# Altium PCB Schaltbox.PcbDoc
Units mm, origin at the board's own origin, x right, y up, seen from the top; angles counter-clockwise.
Board outline 189.6 x 139.6 mm, 2 copper layers (Top Layer, Bottom Layer); 36 components, 30 nets, 198 pads, 10 vias.
Unrouted connection lines stored in the file: 2.
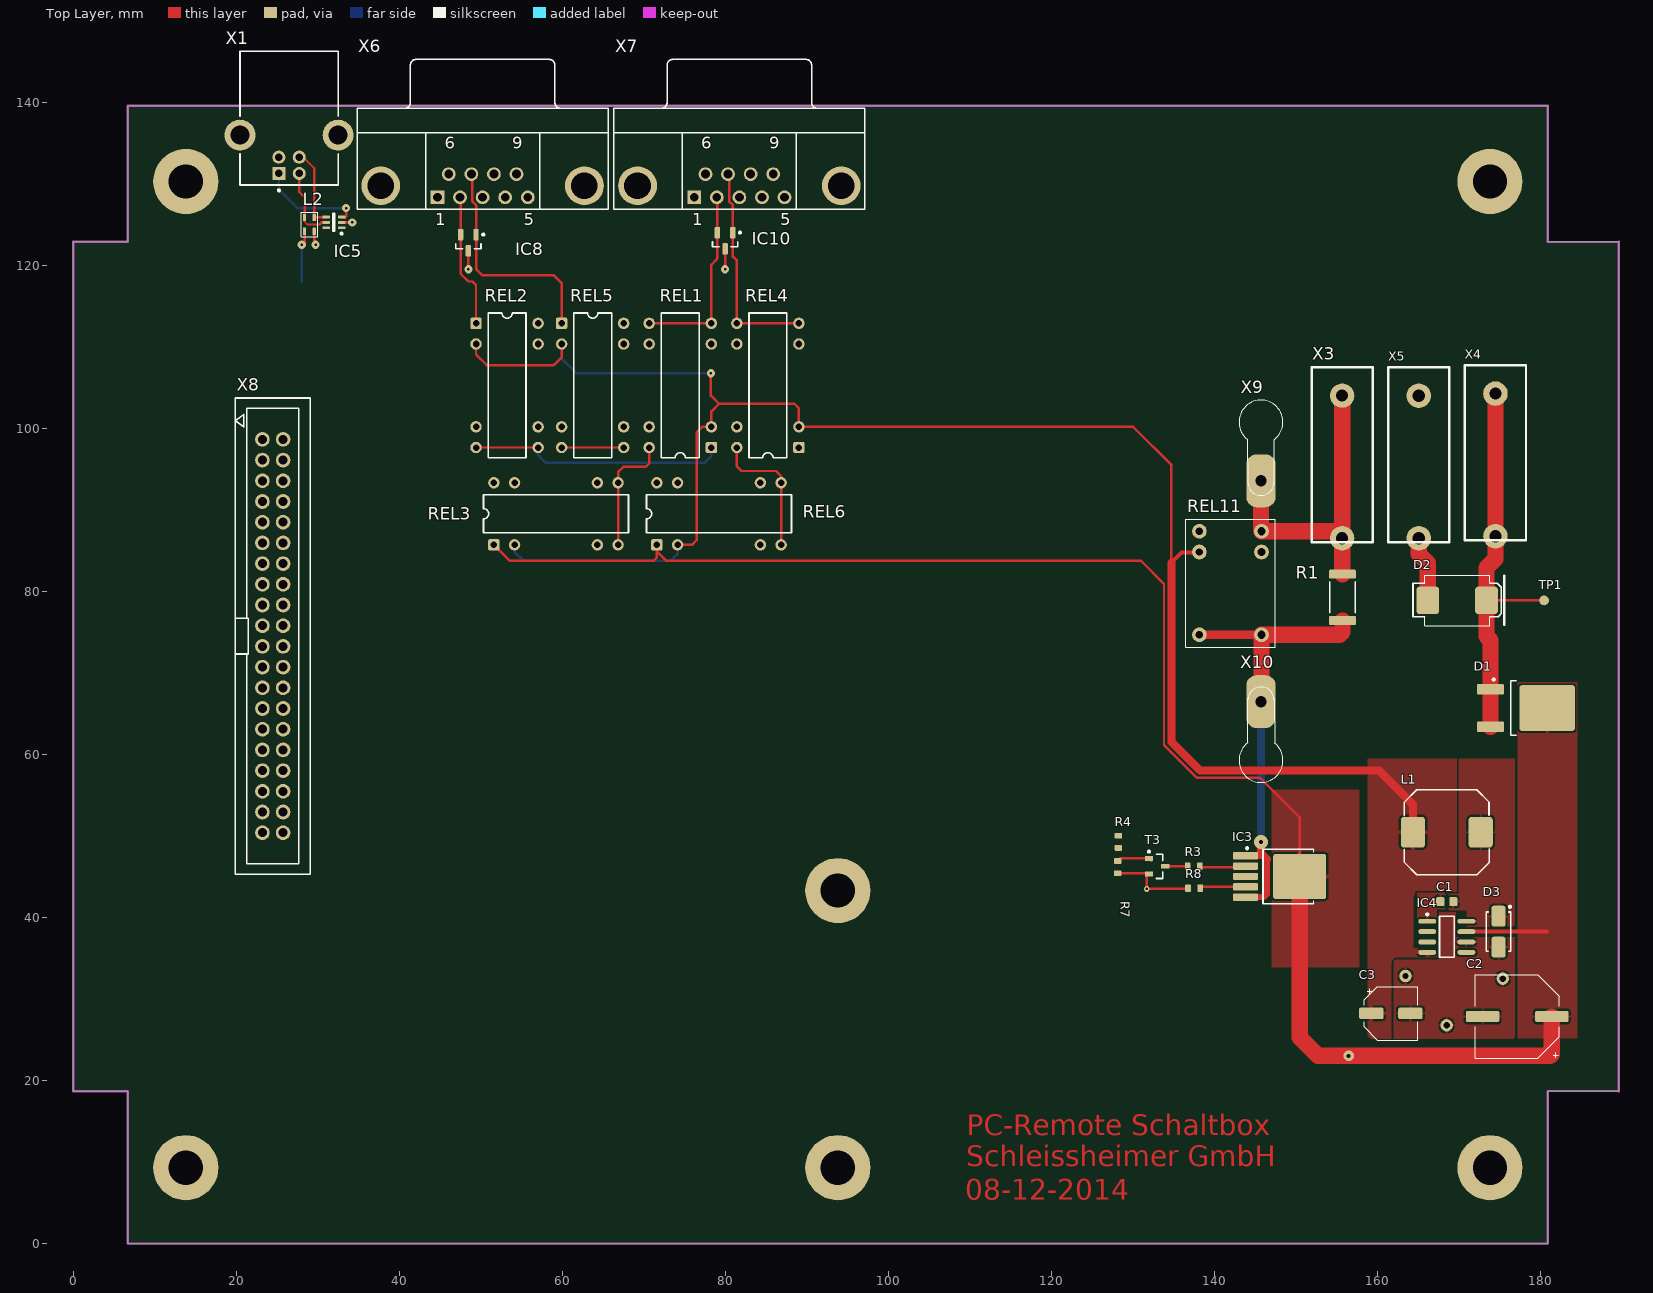
[diagram p0: Top Layer view]
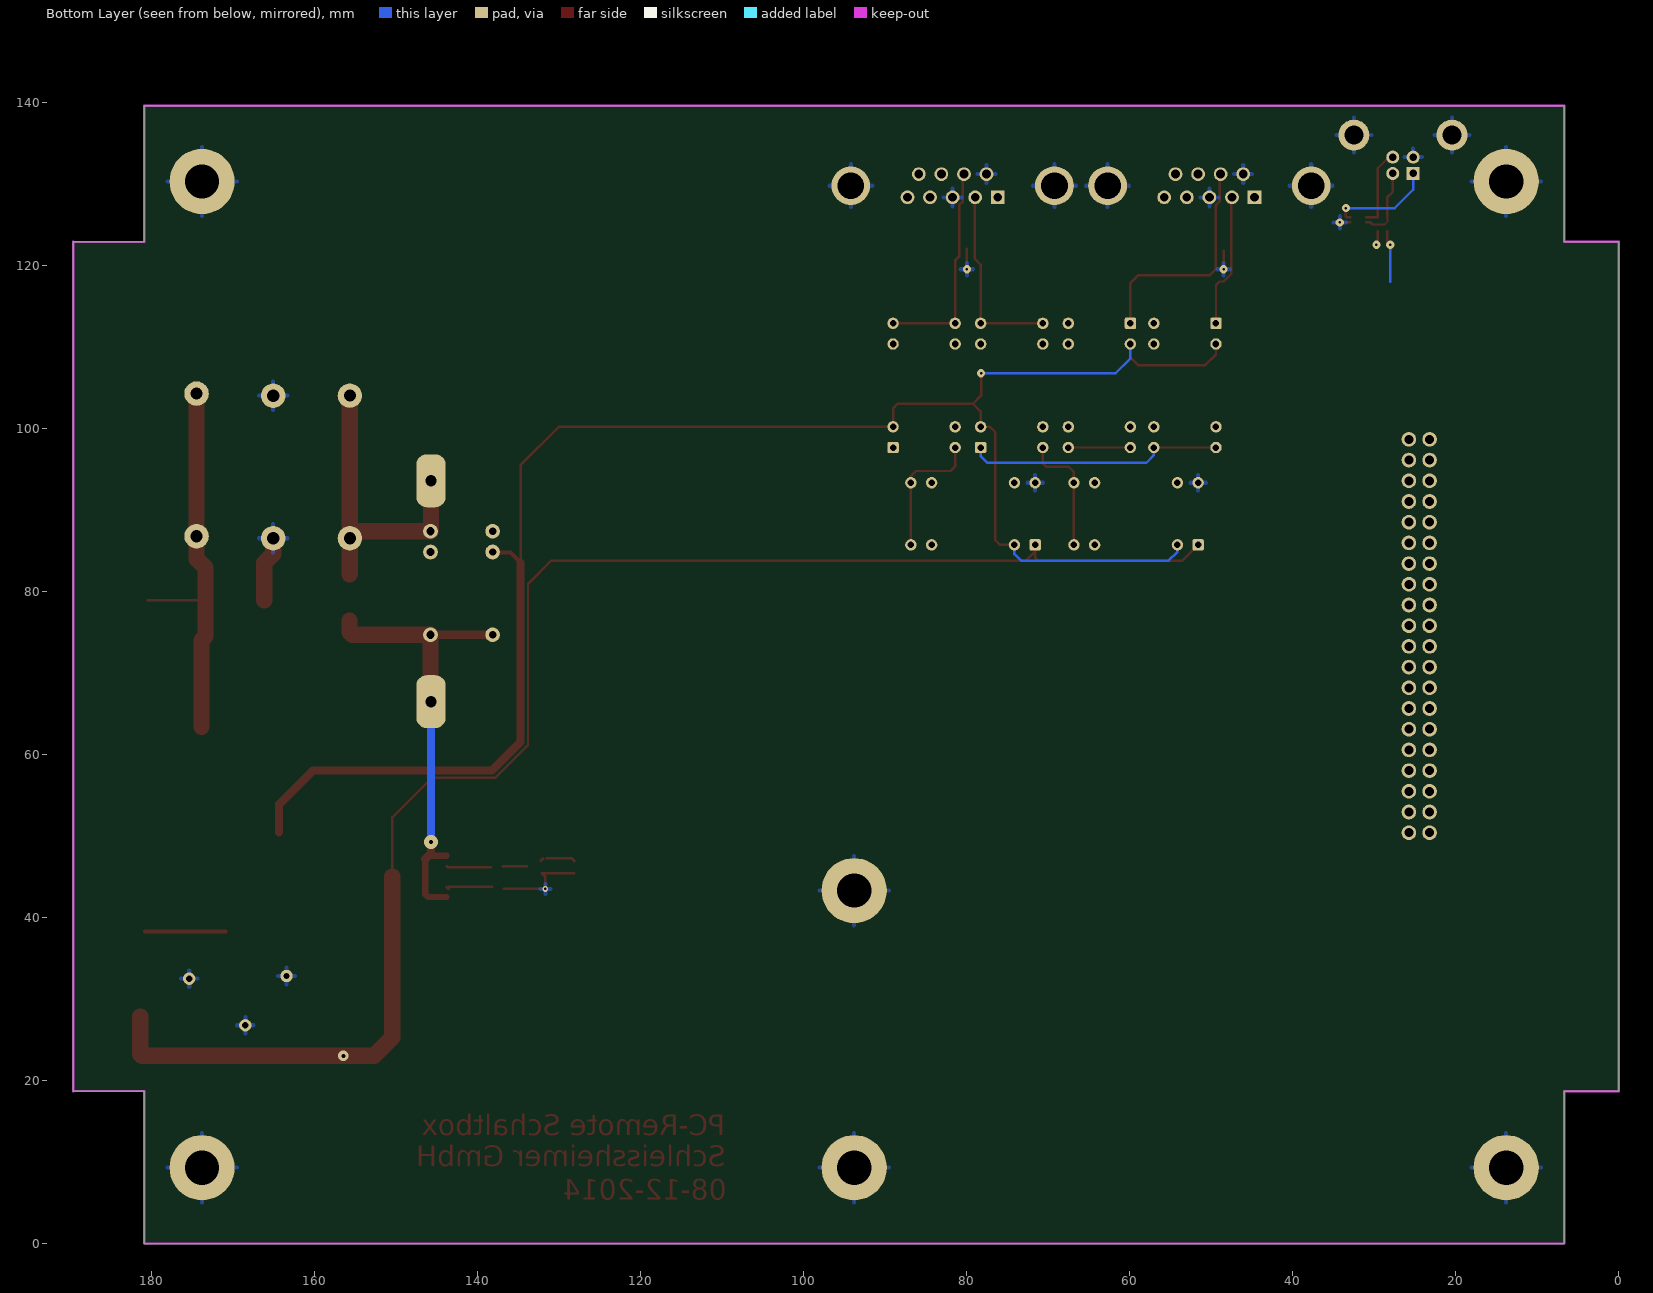
[diagram p1: Bottom Layer view, seen from below]
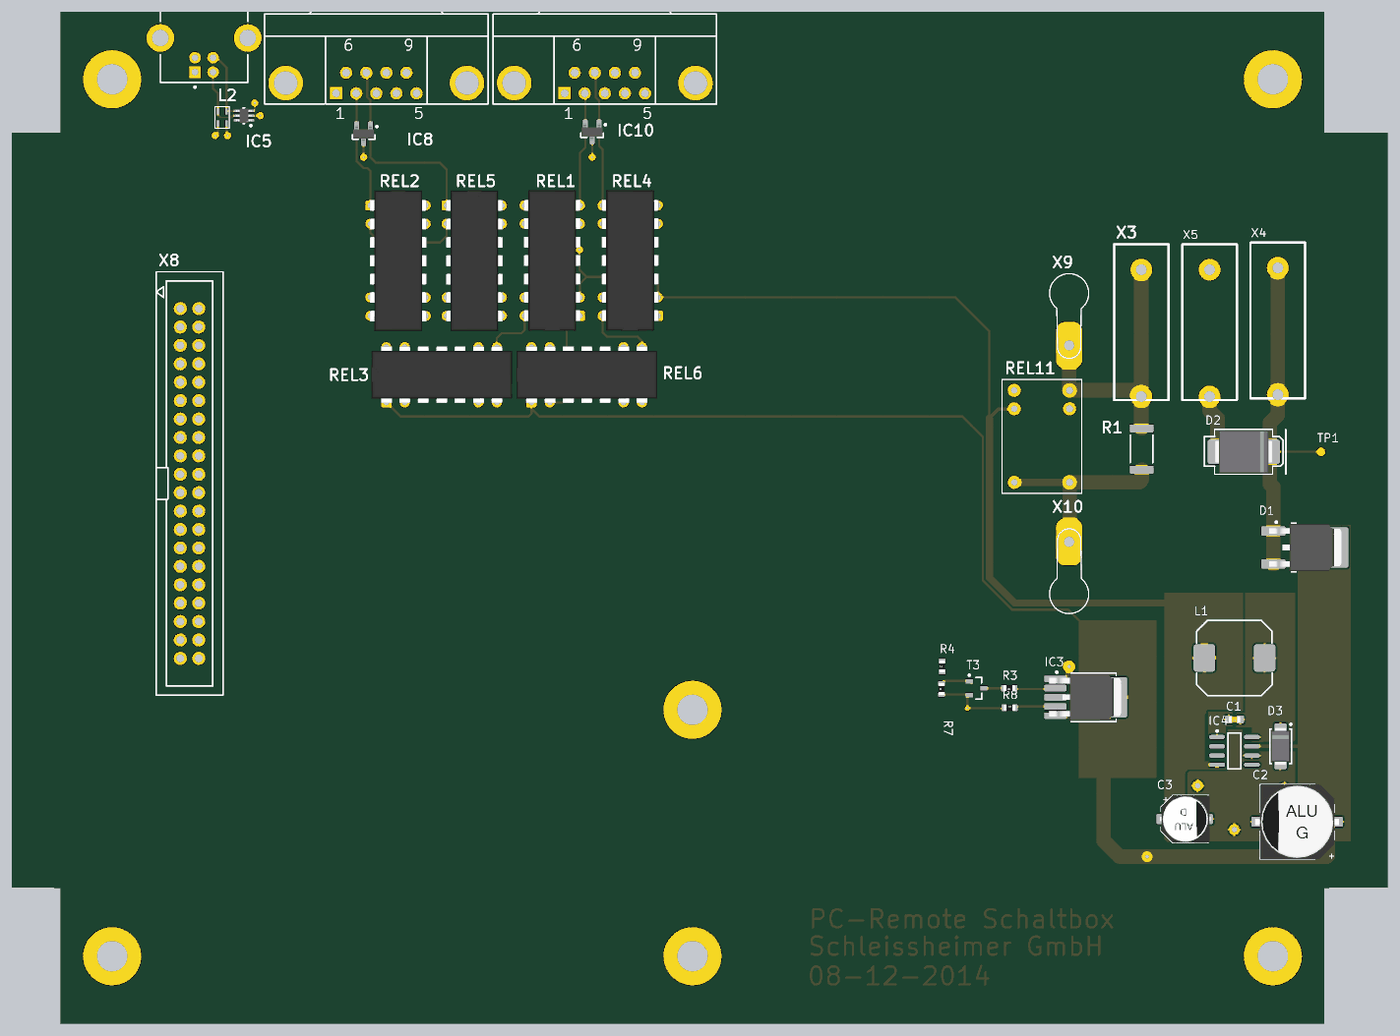
[diagram p2: 3D render of the assembled board from above, using the file's embedded part models]

## Layer stack, top to bottom
Top Solder: solder mask 0.0102, Solder Resist, Dk 3.5
Top Layer: signal copper 0.0356
Dielectric 1: dielectric 0.32, FR-4, Dk 4.8
Bottom Layer: signal copper 0.0356
Bottom Solder: solder mask 0.0102, Solder Resist, Dk 3.5

## Board outline
0.033,18.67 0.033,122.87 6.733,122.87 6.733,139.57 180.933,139.57 180.933,122.87 189.633,122.87 189.633,18.669 180.933,18.669 180.933,-0.03 6.733,-0.03 6.733,18.67

## Design rules (kind name [scope] priority, off if disabled: settings)
Clearance [All] p1: gap=0.254
PlaneConnect [All] p1: planeconnectstyle=Relief reliefexpansion=0.508 reliefentries=4 reliefconductorwidth=0.5 reliefairgap=0.254
PolygonConnect [All] p1: connectstyle=Relief reliefconductorwidth=0.5 reliefentries=4 polygonreliefangle="90 Angle" airgapwidth=0.254
RoutingVias [All] p1: holewidth=0.711 width=1.27 viastyle="Through Hole" minholewidth=0.3 minwidth=1 maxholewidth=0.711 maxwidth=1.27
SolderMaskExpansion [All] p1: expansion=0.102
Width [All] p1: maxlimit=2 minlimit=0.2 preferedwidth=0.3
28 further rules are at their usual default settings.

## Components (designator, comment, footprint, x,y, rotation, side; value= is the part's Value field where it differs from the comment)
C1 "10nF" C0603MD 168.546,41.919 r180 top
C2 "100µF / 63V" ALU-G 177.182,27.822 r0 top
C3 "68µF/16V Low ESW" ALU-D 161.688,28.203 r180 top
D1 "VS-MURB2020CTPBF" TO252-3_LD_(DPAK) 178.452,65.668 r0 top
D2 "SMCJ36A" SMC_MD_(DO214AB) 169.816,78.876 r0 top
D3 "10MQ060N" SMA_LD_(DO214AC) 174.896,38.236 r270 top
IC3 "BTS 433 P" TO252-5_MD_(DPAK) 148.1,45 r0 top
IC4 "LM2672M-5.0" M08A_N 168.546,37.601 r0 top
IC5 "PESD5V0L5UY" "SOT363_MD_(SC88 / SC70-6)" 32,125.25 r180 top
IC8 "PESD2CAN" SOT23_MD 48.5,122.75 r270 top
IC10 "PESD2CAN" SOT23_MD 80,123 r270 top
L1 "47uH" L_B82464-G4 168.546,50.428 r180 top
L2 "USB-Drossel" Drossel-USB 29,125 r270 top
R1 "1R" R2512HD 155.75,79.25 r90 top
R3 "100R" R0603HD 137.5,46.25 r180 top
R4 "10k" R0603HD 128.25,49.25 r90 top
R7 "100k" R0603HD 128.161,46.143 r90 top
R8 "1k" R0603HD 137.545,43.563 r0 top
REL1 "Relay-HE721" "DIP14 - HE700" 74.5,105.25 r180 top
REL2 "Relay-HE721" "DIP14 - HE700" 53.25,105.25 r0 top
REL3 "Relay-HE721" "DIP14 - HE700" 59.25,89.5 r90 top
REL4 "Relay-HE721" "DIP14 - HE700" 85.25,105.25 r180 top
REL5 "Relay-HE721" "DIP14 - HE700" 63.75,105.25 r0 top
REL6 "Relay-HE721" "DIP14 - HE700" 79.25,89.5 r90 top
REL11 "Relay-HFD41" REL_HFD41 142,81 r90 top
T3 "BC847C" SOT23_L 133,46.25 r0 top
TP1 "Testpoint" TESTPAD-1.2mm 180.484,78.876 r90 top
X1 "USB-Connector CAN 1" USB_TypB 26.5,132.25 r90 top
X3 "4mm-Buchse-rt" "4mm-Bu_ liegend-rt" 155.7,86.5 r90 top
X4 "4mm-Buchse-rt" "4mm-Bu_ liegend-rt" 174.515,86.75 r90 top
X5 "4mm-Buchse-bl" "4mm-Bu_ liegend-sw" 165.117,86.496 r90 top
X6 "CAN In" DSUB1.385-2H9 50.25,139.25 r0 top
X7 "CAN Out" DSUB1.385-2H9 81.75,139.25 r0 top
X8 "Header-40pol" SchneidKlemm_40 24.5,74.5 r270 top
X9 "I+" Loetoese-3.2 145.75,100.75 r270 top
X10 "I-" Loetoese-3.2 145.75,59.25 r90 top

## Footprints (in the part's own frame and the unit in brackets; to place one, negate y for a bottom-side part, rotate by r counter-clockwise, add the part's x,y. Pads: shape width x height; smd on the part's side, far side on the other; paste and mask are expansions set on the pad)
"4mm-Bu_ liegend-rt" [mm] "4mm-Buchse, liegend, Farbe rot"
  round 3 hole 1.5: 1(0,0) 1(17.5,0)
  silkscreen extent -0.5,-3.75 21,3.75, body extent -0.6,-3.85 21.1,3.85, height 10.6
"4mm-Bu_ liegend-sw" [mm] "4mm-Buchse, liegend, Farbe schwarz"
  round 3 hole 1.5: 1(0,0) 1(17.5,0)
  silkscreen extent -0.5,-3.75 21,3.75, body extent -0.6,-3.85 21.1,3.85, height 10.6
ALU-D [mm] "Elko, Housing D,  body 6.6mm x 6.6mm, pad 3.0mm x 1.4mm"
  rrect30% 3x1.4 smd: N(-2.4,0) P(2.4,0)
  silkscreen extent -3.3,-3.3 3.3,3.3, body extent -3.6,-3.3 3.4,3.3, height 5.4
ALU-G [mm] "Elko, Housing G,  body 10.3mm x 10.3mm, d = 10mm"
  rrect30% 4.1x1.4 smd: N(-4.25,0) P(4.25,0)
  silkscreen extent -5.15,-5.15 5.15,5.15, body extent -5.8,-5.15 5.8,5.15, height 10.2
C0603MD [mm] "Chip Capacitor, Body 1.6x0.8mm, IPC Medium Density"
  rrect30% 1x1.1 smd: 1(-0.8,0) 2(0.8,0)
  body extent -0.8,-0.4 0.8,0.4, height 0.3
"DIP14 - HE700" [mm] "Hamlin-HE700 DIL14"
  rrect30% 1.4x1.4 hole 0.8: 1(-3.81,7.62)
  round 1.4 hole 0.8: 2(-3.81,5.08) 6(-3.81,-5.08) 7(-3.81,-7.62) 8(3.81,-7.62) 9(3.81,-5.08) 13(3.81,5.08) 14(3.81,7.62)
  silkscreen extent -2.32,-8.89 2.33,8.89, body extent -3.9,-9.73 3.92,9.7, height 4.57
Drossel-USB [mm] "USB20_Datenleitung, WE 744231091"
  rrect30% 0.9x0.4 smd: 1(-0.85,-0.6) 2(0.85,-0.6) 3(0.85,0.6) 4(-0.85,0.6)
  silkscreen extent -1.5,-1 1.5,1, body extent -1.2,-0.7 1.2,0.7, height 1.4
DSUB1.385-2H9 [mm] "Connector; D Subminiature; 9 Position; Right Angle; Pitch 1.385 mm"
  rect 1.69x1.69 hole 1.09: 1(-5.54,-10.92)
  round 1.69 hole 1.09: 2(-2.77,-10.92) 3(0,-10.92) 4(2.77,-10.92) 5(5.54,-10.92) 6(-4.155,-8.08) 7(-1.385,-8.08) 8(1.385,-8.08) 9(4.155,-8.08)
  round 4.76 hole 3.26: 10(-12.495,-9.5) 11(12.495,-9.5)
  silkscreen extent -15.4,-12.4 15.4,6
L_B82464-G4 [mm] "Inductor EPCOS , Body 10.4x10.4mm, B82464-G4"
  rrect30% 3x3.8 smd: 1(-4.15,0) 2(4.15,0)
  silkscreen extent -5.2,-5.2 5.2,5.2, body extent -2.85,-2.5 2.85,2.5, height 4.8
Loetoese-3.2 [mm] "Lötöse M3"
  rrect70% 6.5x3.6 hole 1.4: 1(7.2,0)
  silkscreen extent -2.7,-2.7 9,2.7
M08A_N [mm] "SOIC, 8-Leads, Body 4.9x3.9mm, Pitch 1.27mm, IPC Medium Density"
  oval 2.2x0.6 smd: 1(-2.4,1.905) 2(-2.4,0.635) 3(-2.4,-0.635) 4(-2.4,-1.905) 5(2.4,-1.905) 6(2.4,-0.635) 7(2.4,0.635) 8(2.4,1.905)
  silkscreen extent -2.52,-2.5 0.9,2.88, body extent -2,-2.5 2,2.5, height 1.75
R0603HD [mm] "Chip Resistor, Body 1.6x0.8mm, IPC High Density"
  rrect30% 0.7x0.9 smd: 1(-0.75,0) 2(0.75,0)
  body extent -0.8,-0.4 0.8,0.4, height 0.3
R2512HD [mm] "Chip Resistor, Body 6.3x3.2mm, IPC High Density"
  rrect30% 1.1x3.3 smd: 1(-2.85,0) 2(2.85,0)
  silkscreen extent -1.9,-1.55 1.9,1.55, body extent -3.22,-1.68 3.22,1.68, height 0.71
REL_HFD41 [mm] "Relay HFD41-Serie, DPDT"
  round 1.8 hole 1: 1(-6.35,-3.81) 3(3.81,-3.81) 4(6.35,-3.81)
  round 1.8 hole 0.9: 5(6.35,3.81) 6(3.81,3.81) 8(-6.35,3.81)
  silkscreen extent -7.85,-5.5 7.85,5.5, body extent -7.85,-5.53 7.83,5.5, height 12
SchneidKlemm_40 [mm] "Schneid-Klemmsteckverbinder, 40pol. RM2.54"
  round 1.8 hole 1.1: 1(-24.13,-1.27) 2(-24.13,1.27) 3(-21.59,-1.27) 4(-21.59,1.27) 5(-19.05,-1.27) 6(-19.05,1.27) 7(-16.51,-1.27) 8(-16.51,1.27) 9(-13.97,-1.27) 10(-13.97,1.27) 11(-11.43,-1.27) 12(-11.43,1.27) 13(-8.89,-1.27) 14(-8.89,1.27) 15(-6.35,-1.27) 16(-6.35,1.27) 17(-3.81,-1.27) 18(-3.81,1.27) 19(-1.27,-1.27) 20(-1.27,1.27) 21(1.27,-1.27) 22(1.27,1.27) 23(3.81,-1.27) 24(3.81,1.27) 25(6.35,-1.27) 26(6.35,1.27) 27(8.89,-1.27) 28(8.89,1.27) 29(11.43,-1.27) 30(11.43,1.27) 31(13.97,-1.27) 32(13.97,1.27) 33(16.51,-1.27) 34(16.51,1.27) 35(19.05,-1.27) 36(19.05,1.27) 37(21.59,-1.27) 38(21.59,1.27) 39(24.13,-1.27) 40(24.13,1.27)
  silkscreen extent -29.21,-4.6 29.21,4.6
SMA_LD_(DO214AC) [mm] "Molded Diode, 2-Leads, Body 4,4x2,7mm, IPC Low Density"
  rrect30% 2.55x1.7 smd: 1(-1.9,0) 2(1.9,0)
  silkscreen extent -3.17,-1.5 2.4,1.53, body extent -2.6,-1.47 2.6,1.48, height 2.7
SMC_MD_(DO214AB) [mm] "DO-214-AB/SMC; 2 C-Bend Leads; Body 7.15 x 6.25mm"
  rrect30% 2.8x3.4 smd: 1(3.6,0) 2(-3.6,0)
  silkscreen extent -5.43,-3.1 5.8,3.1, body extent -3.98,-2.95 3.98,2.95, height 2.3
SOT23_L [mm] "SOT23, 3-Leads, Body 2.9x1.3mm, Pitch 0.95mm, Lead Span 2.3mm, IPC High Density"
  rect 1x0.6 smd: 1(-1,0.95) 2(-1,-0.95) 3(1,0)
  silkscreen extent -1.12,-1.5 0.7,1.92, body extent -0.7,-1.5 0.7,1.5, height 1.1
SOT23_MD [mm] "SOT23, 3-Leads, Body 3,1x2,6mm (max), Pitch 0,95mm, IPC Medium Density"
  rrect30% 1.4x0.65 smd: 1(-1,0.95) 2(-1,-0.95) 3(1,0)
  silkscreen extent -1.12,-1.55 0.75,1.95, body extent -1.25,-1.56 1.23,1.56, height 1.3
"SOT363_MD_(SC88 / SC70-6)" [mm] "SOT323, 6-Leads, Body 2,2x2,4mm (max), Pitch 0,65mm, IPC Medium Density"
  rrect30% 0.9x0.35 smd: 1(-0.95,0.65) 2(-0.95,0) 3(-0.95,-0.65) 4(0.95,-0.65) 5(0.95,0) 6(0.95,0.65)
  silkscreen extent -1.08,-1.1 0.1,1.5, body extent -1.05,-1.1 1.05,1.1, height 1.1
TESTPAD-1.2mm [mm] "Testpad 1.2mm"
  round 1.2 smd paste-2: 1(0,0)
TO252-3_LD_(DPAK) [mm] "TO252, IPC Low Density"
  rrect30% 3.35x1.3 smd: 1(-4.55,2.29) 3(-4.55,-2.29)
  rrect10% 6.8x5.6 smd: 4(2.4,0)
  silkscreen extent -4.27,-3.35 -1.4,3.61, body extent -5.1,-3.27 4.84,3.27, height 2.41
TO252-5_MD_(DPAK) [mm] "TO252, IPC Medium Density"
  rrect30% 3.05x0.9 smd: 1(-4.25,2.54) 2(-4.25,1.27) 3(-4.25,-0.005) 4(-4.25,-1.27) 5(-4.25,-2.54)
  rrect10% 6.5x5.55 smd: T(2.4,0)
  silkscreen extent -4.17,-3.35 4.13,3.59, body extent -5.1,-3.27 4.84,3.27, height 2.41
USB_TypB [mm] "Connector; USB2, Type B, Thru-Hole; 4 Position; Right Angle"
  round 3.8 hole 2.3: B1(3.71,6.02) B2(3.71,-6.02)
  round 1.6 hole 0.92: D+(1,-1.25) D-(-1,-1.25) GND(1,1.25)
  rect 1.6x1.6 hole 0.92: VBUS(-1,1.25)
  silkscreen extent -3.18,-6.02 13.99,6.02, body extent -2.41,-6.02 13.99,6.02, height 11.1

## Part data
C1: library part Cap, "Capacitor"
C2 C3: library part "Cap Pol", "Capacitor Polarized"
D1: library part MURD620CT, "Schottky Barrier Double Diode"
D2: "Suppressor Diode, unidirektional, 36V, 1500 W, fFotprint SMC"
D3: library part 10MQ060NPbF, "Schotky Diode 2,1A 60V, footprint SMA"
IC3: library part "BTS443 P"
IC4: "SIMPLE SWITCHER® Power Converter High Efficiency 1A Step-Down Voltage Regulator with Features, 8-pin Narrow SOIC"
IC5: "ESD_Protection 5 Lines"
IC8 IC10: "ESD-Protection CAN-Bus"
L1: library part Inductor, "Inductor"
L2: "USB 2.0-Drossel, Commen-Mode Noise Supressor"
R1 R3 R4 R7 R8: library part Res, "Resistor"
REL1 REL2 REL3 REL4 REL5 REL6: "Hamlin Reed-Relay SPDT"
REL11: "Relay Hongfa Typ HFD41, SPDT, 2A/ 250VAC/30VDC"
T3: "NPN General-purpose Transistor"
X1: library part "USB-Typ AB", "USB-Stecker-Typ A und B,THT"
X3 X4 X5: "Bananen-Stecker 4mm"
X6 X7: library part "D Connector 9", "Receptacle Assembly, 9 Position, Right Angle"
X8: library part CON-40pol, "Schneid-Klemm-Verbinder 40pol"
X9 X10: library part Anschlusspin, "Anschluss, Bohrung 1.2mm"

## Free pads (board coordinates)
  round 8 hole 4.2: 0(13.833,9.27) 0(13.833,130.27) 0(93.833,9.27) 0(93.833,43.27) 0(173.833,9.27) 0(173.833,130.27)
  round 1.524 hole 0.762: 0(163.474,32.791) 1(175.412,32.461) 2(168.529,26.746)

## Via types
v1: diameter 1, hole 0.3, Top Layer to Bottom Layer, 7 vias
v2: diameter 1.27, hole 0.5, Top Layer to Bottom Layer, 1 vias
v3: diameter 1.7, hole 0.5, Top Layer to Bottom Layer, 1 vias
v4: diameter 0.7, hole 0.3, Top Layer to Bottom Layer, 1 vias

## Nets (pads, with @x,y where several pads share a name; then routed paths per layer and width w, separated by ;. In a path a pad name is that pad's centre, name@x,y a point inside that pad or via, vN(x,y) a via of type N, cw(c..) or ccw(c..) an arc to the next point about the centre after c; other vN are vias at no path point)
CANH1: IC8.1 REL5.1 X6.7 | length 28
  Top Layer w0.3: X6.7 49.001,131.034 49.001,127.813 49.45,127.364 IC8.1 49.45,119.55 50.25,118.75 59,118.75 59.94,117.81 REL5.1
CANH1-BREAK: REL5.6
CANH1-GND: REL6.6
CANH1-OUT: IC10.1 REL4.7 REL4.8 X7.7 | length 26.4
  Top Layer w0.3: X7.7 80.501,131.034 80.501,127.813 80.95,127.364 IC10.1 80.95,121.05 81.44,120.56 REL4.8 REL4.7
CANH1-TO: REL4.6
CANL1: IC8.2 REL2.1 X6.2 | length 16.6
  Top Layer w0.3: X6.2 47.55,128.26 IC8.2 47.55,118.95 48.5,118 49,118 49.44,117.56 REL2.1
CANL1-BREAK: REL2.6
CANL1-GND: REL3.6
CANL1-OUT: IC10.2 REL1.7 REL1.8 X7.2 | length 23.4
  Top Layer w0.3: REL1.8 REL1.7 78.31,120.06 79.05,120.8 IC10.2 79.05,128.26 X7.2
CANL1-TO: REL1.6
GND: C2.N C3.N D2.2 D3.2 IC4.6 IC5.2 IC8.3 IC10.3 pad.0 pad.1 pad.2 R7.1 R8.1 REL3.14 REL6.14 T3.2 X1.B1 X1.B2 X1.GND X5.1 X6.3 X6.6 X6.10 X6.11 X7.3 X7.6 X7.10 X7.11 | length 25.4
  Top Layer w0.3: IC5.2 v1@34.5,125.25 ; v1(48.5,119.5) IC8.3 ; v1(80,119.5) IC10.3 ; R7.1 132.187,45.393 131.717,44.923 131.717,43.783 132.024,43.476 R8.1@136.809,43.476
  Top Layer w2: X5.1@165.117,86.496 165.117,84.565 166.216,83.466 D2.2
  other v1: 34.25,125.25
  other v4: 131.717,43.476
NetC1_1: C1.1 D3.1 IC4.8 L1.1
NetC1_2: C1.2 IC4.1
NetD1_1: D1.1 D1.3 D2.1 TP1.1 X4.1 | length 48.6
  Top Layer w0.3: D2.1 TP1.1
  Top Layer w2: D1.3 D1.1 173.902,74.002 173.416,74.488 D2.1 173.416,82.865 174.515,83.964 174.515,86.75 X4.1@174.515,104.25
NetIC3_1: IC3.1 IC3.5 R1.1 REL11.1 REL11.8 X10.1 | length 56.2
  Top Layer w0.75: IC3.5 146.068,42.46 146.449,42.841 146.449,47.159 ; IC3.1 146.068,47.54
  Top Layer w1: REL11.8 REL11.1 ; v3(145.75,49.25) 145.75,47.858 146.068,47.54 146.449,47.159
  Top Layer w2: X10.1 145.81,66.51 REL11.1 155.4,74.65 155.75,75 R1.1
  Bottom Layer w1: v3(145.75,49.25) X10.1
NetIC3_2: IC3.2 R3.1 | length 5.5
  Top Layer w0.3: R3.1@138.436,46.143 143.723,46.143 IC3.2
NetIC3_4: IC3.4 R8.2 | length 5.6
  Top Layer w0.3: R8.2@138.241,43.73 IC3.4@143.528,43.73 ; IC3.4@143.596,43.476 IC3.4
NetIC5_4: IC5.4 L2.4 X1.D+ | length 9.9
  Top Layer w0.3: X1.D+ 28.25,133.25 29.6,131.9 L2.4 29.65,125.9 IC5.4@31,125.9
NetIC5_5: IC5.5 L2.1 X1.D- | length 9
  Top Layer w0.2: L2.1 28.4,125.35 28.75,125 30.25,125
  Top Layer w0.3: X1.D- 27.75,129 28.4,128.35 L2.1 ; 30.25,125 30.5,125.25 IC5.5@31,125.25
NetR3_2: R3.2 T3.3 | length 2.9
  Top Layer w0.3: T3.3 R3.2@136.949,46.25
NetR4_1: R4.1 R7.2 T3.1 | length 4
  Top Layer w0.3: R7.2 128.518,47.25 T3.1@131.576,47.25 ; T3.1 T3.1@132.284,46.916
NetREL1_1: REL1.1 REL2.7 REL2.8 | length 31.6
  Top Layer w0.3: REL2.7 REL2.8
  Bottom Layer w0.3: REL2.8 57.06,96.69 58,95.75 77.486,95.75 78.31,96.574 REL1.1
NetREL1_14: REL1.14 REL3.7 REL3.8 | length 15.1
  Top Layer w0.3: REL3.7 REL3.8 66.87,94.62 67.5,95.25 70.25,95.25 70.69,95.69 REL1.14
NetREL4_1: REL4.1 REL5.7 REL5.8 | length 7.6
  Top Layer w0.3: REL5.7 REL5.8
NetREL4_14: REL4.14 REL6.7 REL6.8 | length 16.7
  Top Layer w0.3: REL4.14 81.44,95.31 82,94.75 86.25,94.75 86.87,94.13 REL6.8 REL6.7
OUT1: R1.2 REL11.4 X3.1 X9.1 | length 38.4
  Top Layer w2: X9.1 145.75,87.41 REL11.4 154.85,87.35 X3.1@155.7,86.5 ; X3.1@155.7,104 X3.1@155.7,86.5 ; R1.2 155.7,82.15 X3.1@155.7,86.5
SHUNT: REL11.3
UB+: C2.P D1.4 IC3.T IC4.7 REL3.1 REL6.1 | length 200.7
  Top Layer w0.3: REL3.1 53.57,83.75 71.25,83.75 71.63,84.13 71.63,84.87 ; REL6.1 71.63,84.87 ; IC3.T 150.5,52.25 145.654,57.096 137.876,57.096 133.846,61.126 133.846,80.904 131,83.75 72.75,83.75 71.63,84.87 ; v2(156.5,23) 157,22.5
  Top Layer w0.5: IC4.7 180.857,38.236
  Top Layer w2: IC3.T 150.5,25.25 152.75,23 v2(156.5,23) 181.25,23 181.432,23.182 C2.P
V5: C3.P IC4.4 L1.2 REL1.2 REL2.2 REL3.2 REL4.2 REL5.2 REL6.2 REL11.6 | length 217.4
  Top Layer w0.3: REL2.2 49.44,109.06 50.75,107.75 59,107.75 59.94,108.69 REL5.2 ; REL6.2 75.94,85.69 76.5,86.25 76.5,99.5 77.17,100.17 REL1.2 78.31,102.06 79.25,103 ; v1(78.25,106.75) 78.25,104 79.25,103 ; 134.75,83.5 134.75,95.5 130.08,100.17 REL4.2 89.06,102.44 88.5,103 79.25,103
  Top Layer w0.5: 134.75,83.5 136,84.75 138.13,84.75 REL11.6
  Top Layer w1: 134.75,83.5 134.75,61.5 138.25,58 160.25,58 164.396,53.854 L1.2
  Bottom Layer w0.3: REL3.2 54.17,84.83 55.25,83.75 73.366,83.75 74.17,84.554 REL6.2 ; REL5.2 59.94,108.56 61.75,106.75 v1(78.25,106.75)
VBUS1: IC5.3 X1.VBUS | length 12.8
  Top Layer w0.3: IC5.3 33.4,125.9 33.5,126 v1(33.5,127)
  Bottom Layer w0.3: X1.VBUS 25.25,129.25 27.5,127 v1(33.5,127)
pads on no net: IC3.3 IC4.2 IC4.3 IC4.5 IC5.1 IC5.6 L2.2 L2.3 R4.2 REL1.9 REL1.13 REL2.9 REL2.13 REL2.14 REL3.9 REL3.13 REL4.9 REL4.13 REL5.9 REL5.13 REL5.14 REL6.9 REL6.13 REL11.5 X6.1 X6.4 X6.5 X6.8 X6.9 X7.1 X7.4 X7.5 X7.8 X7.9 X8.1 X8.2 X8.3 X8.4 X8.5 X8.6 X8.7 X8.8 X8.9 X8.10 X8.11 X8.12 X8.13 X8.14 X8.15 X8.16 X8.17 X8.18 X8.19 X8.20 X8.21 X8.22 X8.23 X8.24 X8.25 X8.26 X8.27 X8.28 X8.29 X8.30 X8.31 X8.32 X8.33 X8.34 X8.35 X8.36 X8.37 X8.38 X8.39 X8.40
copper on no net: | length 8.1
  Top Layer w0.3: v1(28.05,122.5) 28.4,122.85 28.4,124.15 ; 29.6,124.15 29.6,122.65 v1(29.75,122.5)
  Bottom Layer w0.3: 28.05,117.95 v1(28.05,122.5)

## Polygon pours and split planes (outlines as drawn)
UB+ on Top Layer "Highside" (solid, pour order 9): 147.084,55.613 147.084,33.863 157.795,33.863 157.795,55.613
V5 on Top Layer "Vcc" (solid, remove dead copper, pour order 18): 169.698,59.563 169.748,59.513 169.748,43.063 164.922,43.063 164.599,42.739 164.449,42.59 164.449,36.169 167.211,36.169 167.435,35.945 167.385,35.896 167.385,34.875 162.186,34.875 161.812,34.502 161.738,34.427 161.738,25.07 159.2,25.07 158.877,25.393 158.877,59.439 158.977,59.538
UB+ on Top Layer "Vin" (solid, remove dead copper, pour order 19): 184.556,25.146 177.272,25.146 177.272,68.565 177.241,68.809 184.556,68.809
GND on Top Layer "Gnd" (solid, remove dead copper, pour order 17): 176.911,37.521 169.697,37.521 169.647,37.572 169.647,40.589 167.589,40.589 167.564,40.564 167.564,34.782 162.179,34.782 162.077,34.681 162.052,34.655 162.052,25.121 176.708,25.121 176.911,25.323
NetC1_2 on Top Layer "Fb" (solid, remove dead copper, pour order 13): 168.326,40.97 168.326,42.926 168.224,43.028 168.199,43.002 164.897,43.002 164.897,38.938 164.922,38.913 167.335,38.913 167.335,40.996
NetC1_1 on Top Layer "Vsw" (solid, pour order 12): 170.975,38.837 170.975,40.799 170.901,40.872 168.783,40.872 168.783,42.81 168.832,42.859 170.015,42.859 170.015,59.391 169.916,59.489 169.99,59.563 176.911,59.563 176.911,39.106 176.689,38.886
GND on Bottom Layer "Ground" (none, pour order 11): 1.43,121.318 7.93,121.318 7.93,138.318 180.83,138.318 180.83,121.318 189.43,121.318 189.43,18.818 180.93,18.818 180.93,-0.182 7.93,-0.182 7.93,18.818 0.93,18.818

## Keep-outs
Keep-Out Layer:
  the board outline again, w0.3

## Other copper
Top Layer:
  text "PC-Remote Schaltbox" at 109.67,13.229 h2.5
  text "Schleissheimer GmbH" at 109.569,9.47 h2.5
  text "08-12-2014" at 109.493,5.355 h2.5

## Dimensions
0.033,18.67 to 6.733,-0.03 on Mechanical 1
6.733,-0.03 to 0.033,18.67 on Mechanical 1

## Text inside footprints (layer, text, board x,y; h text height)
X6: Top Overlay "6" at 45.595,134.275 h1.5; Top Overlay "9" at 53.905,134.275 h1.5; Top Overlay "5" at 55.29,124.875 h1.5; Top Overlay "1" at 44.46,124.875 h1.5
X7: Top Overlay "6" at 77.095,134.275 h1.5; Top Overlay "9" at 85.405,134.275 h1.5; Top Overlay "5" at 86.79,124.875 h1.5; Top Overlay "1" at 75.96,124.875 h1.5